# Altium PCB RPD_lower.PcbDoc
Units mm, origin at the board's own origin, x right, y up, seen from the top; angles counter-clockwise.
Board outline 100 x 100 mm, 4 copper layers (Top Layer, Internal Plane 1, Internal Plane 2, Bottom Layer), stack 0.462 mm thick; 87 components, 79 nets, 326 pads, 57 vias.
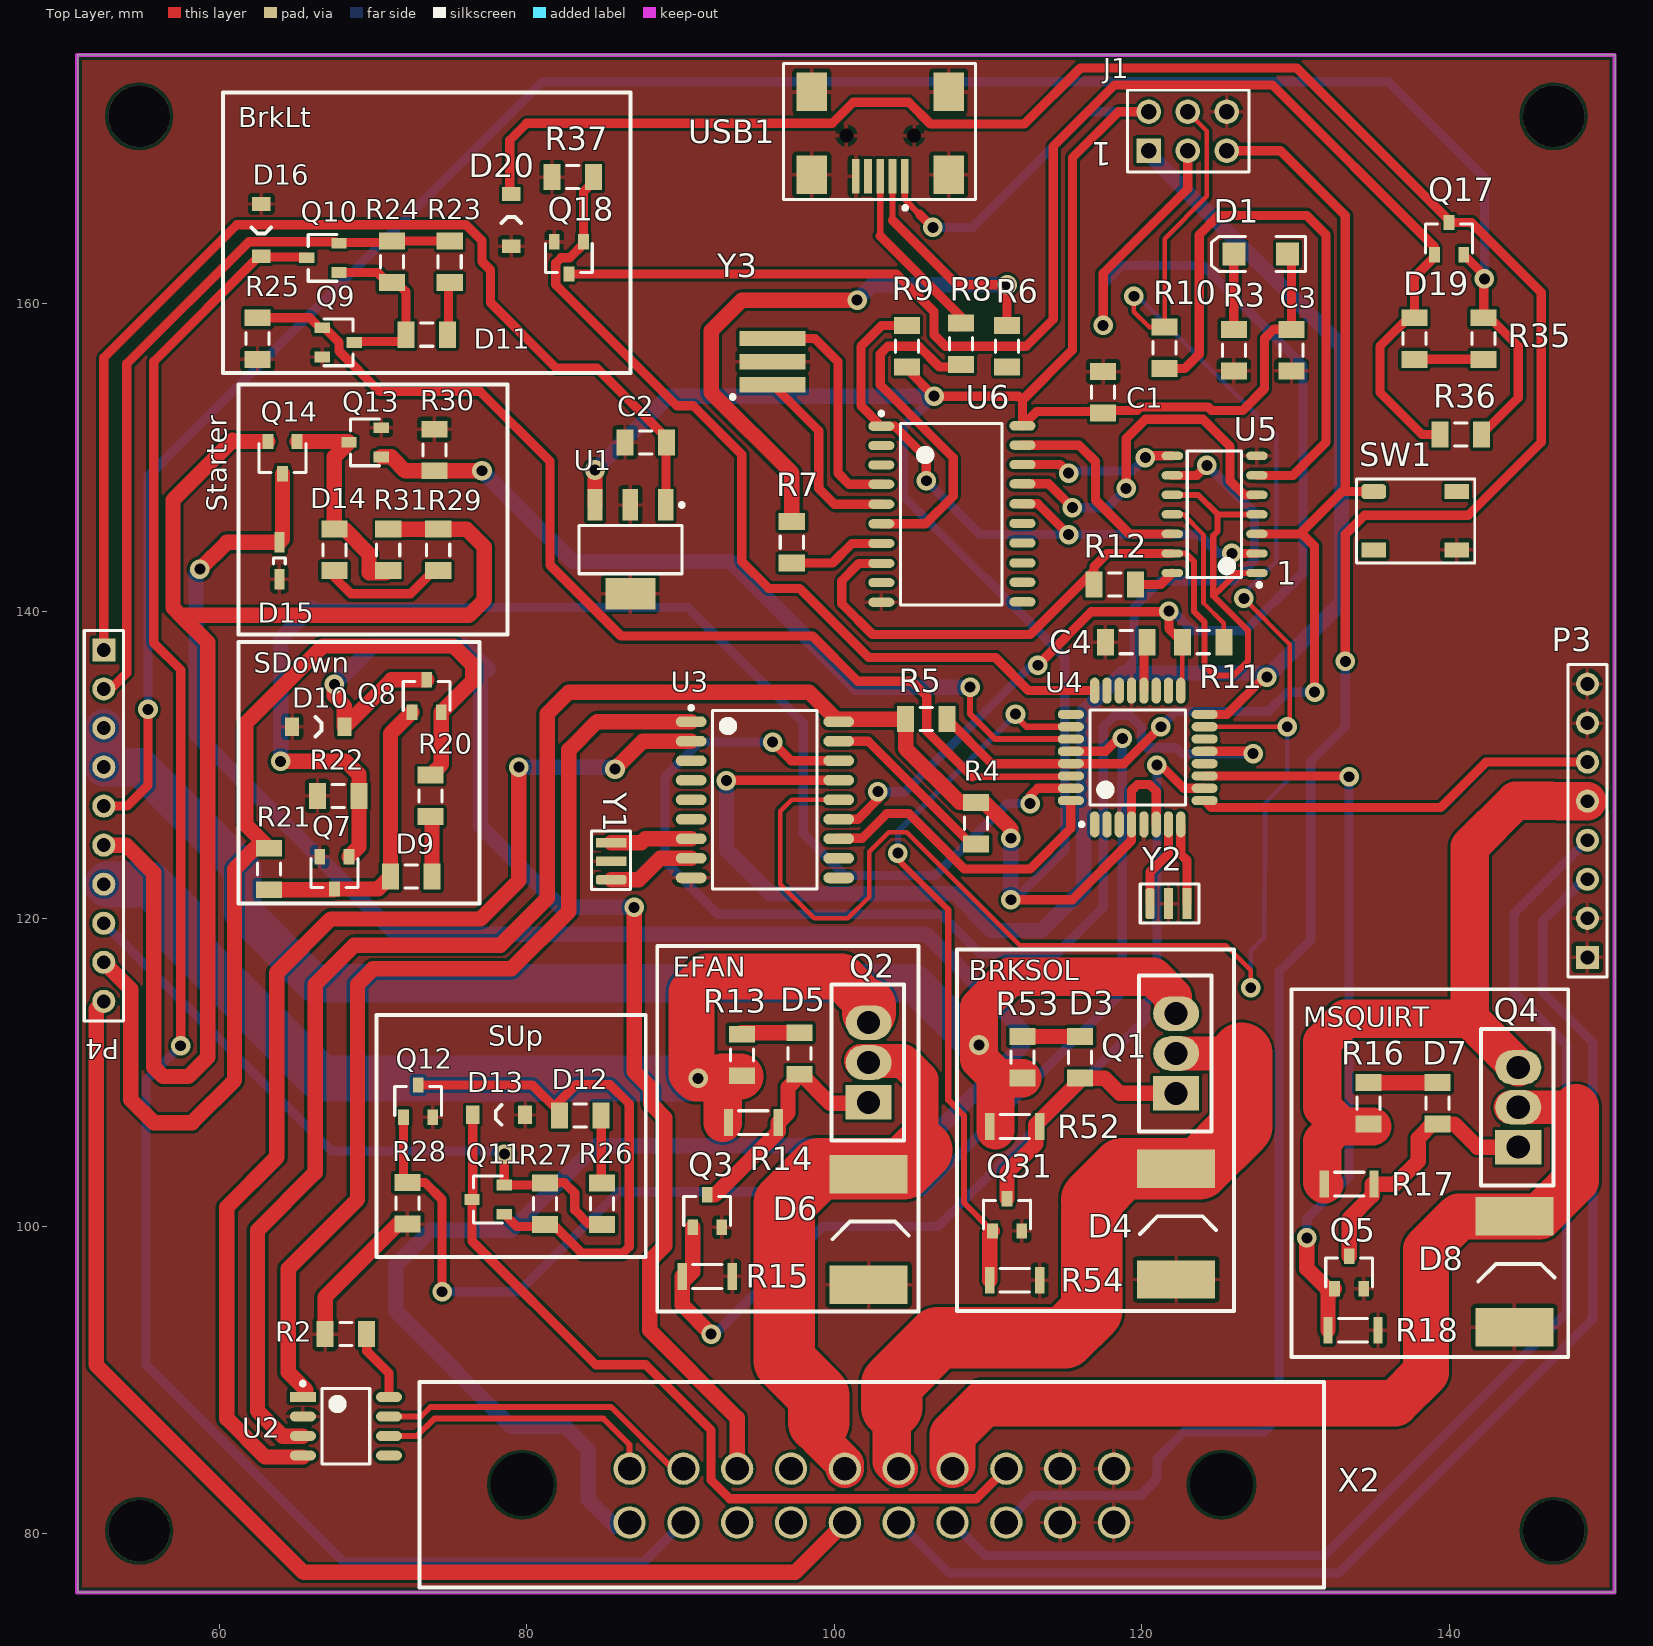
[diagram p0: Top Layer view]
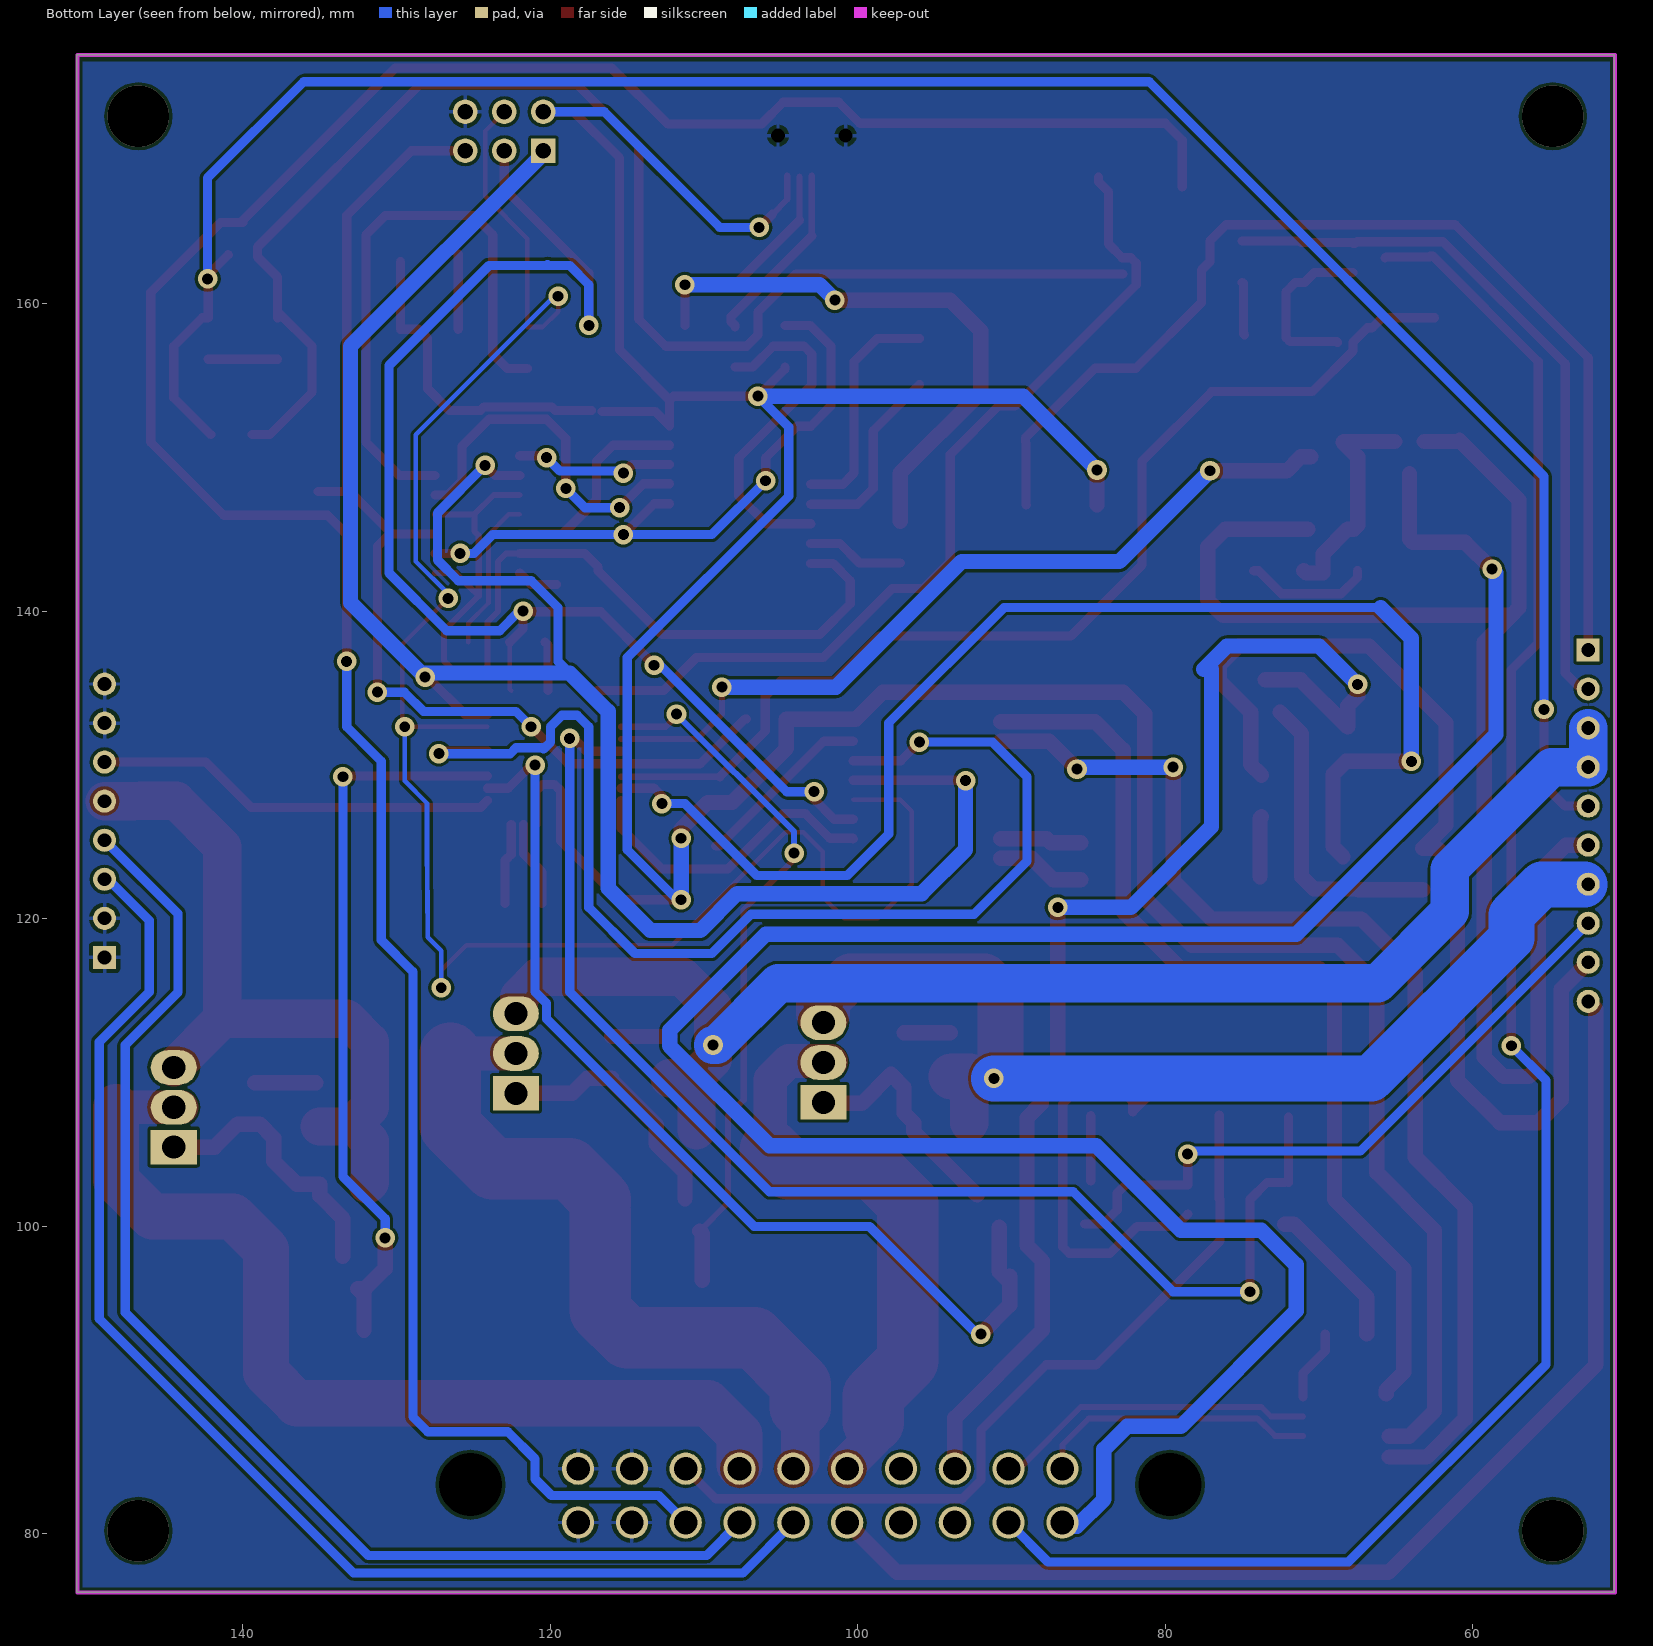
[diagram p1: Bottom Layer view, seen from below]
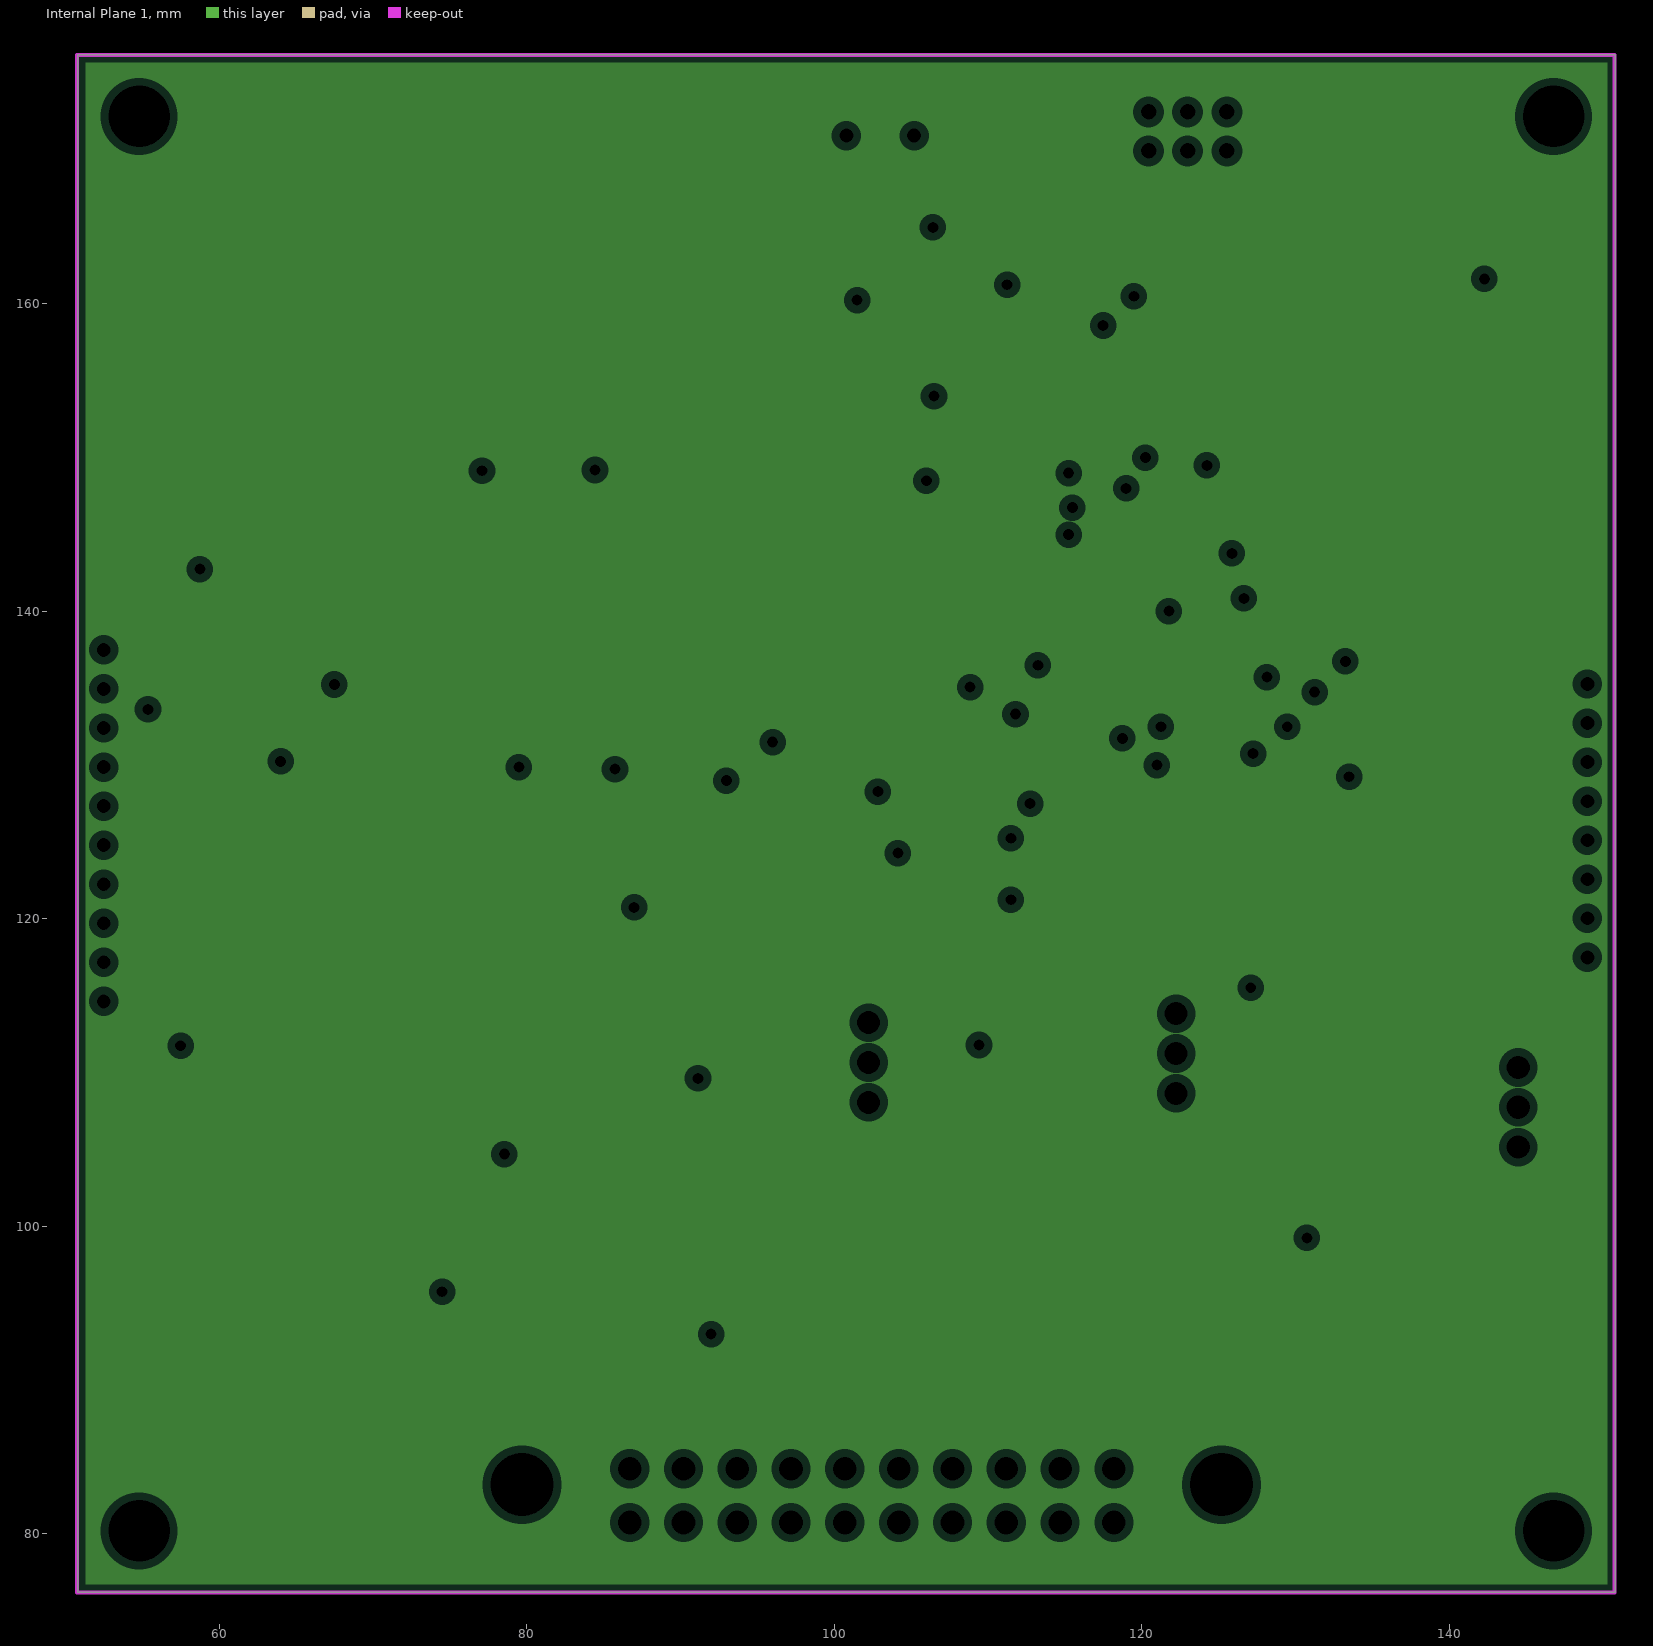
[diagram p2: Internal Plane 1, clearances drawn from the general rule]
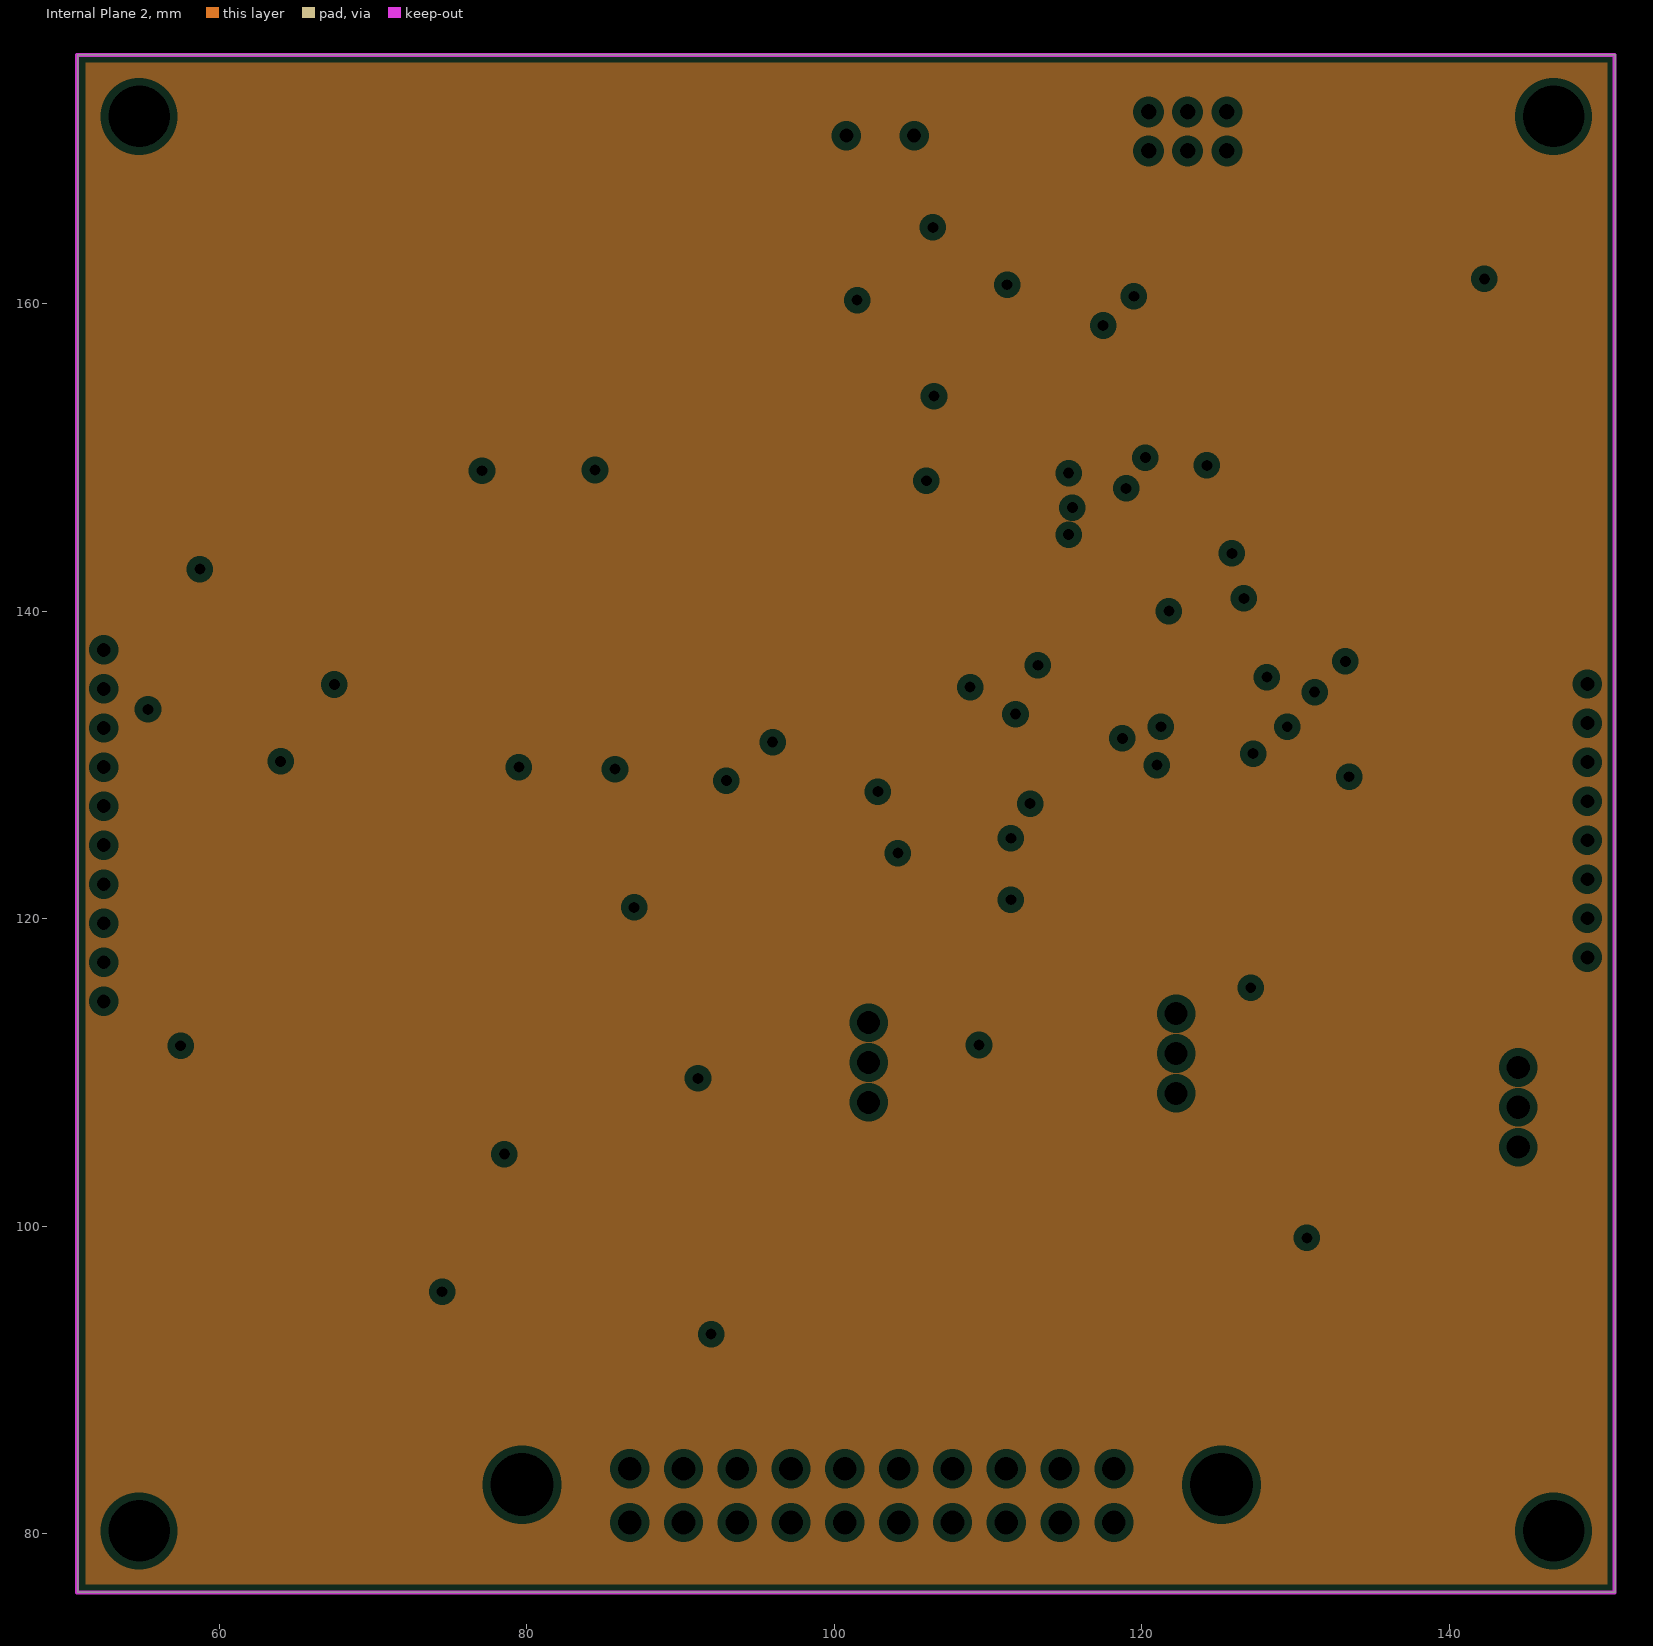
[diagram p3: Internal Plane 2, clearances drawn from the general rule]

## Layer stack, top to bottom
Top Solder: solder mask 0.0102, Solder Resist, Dk 3.5
Top Layer: signal copper 0.0356
Internal Plane 1: plane copper 0.0356
Internal Plane 2: plane copper 0.0356
Dielectric 1: dielectric 0.32, FR-4, Dk 4.8
Bottom Layer: signal copper 0.0356
Bottom Solder: solder mask 0.0102, Solder Resist, Dk 3.5

## Board outline
50.8,76.2 150.8,76.2 150.8,176.2 50.8,176.2

## Design rules (kind name [scope] priority, off if disabled: settings)
Clearance [All] p1: gap=0.2 ignorepadtopadclearanceinfootprint=FALSE
DiffPairsRouting [All] p1: maxlimit=0.254 minlimit=0.254 mostfreqgap=0.254 toplayer_minwidth=0.381 toplayer_maxwidth=0.381 toplayer_prefwidth=0.381 bottomlayer_minwidth=0.381 bottomlayer_maxwidth=0.381 bottomlayer_prefwidth=0.381 maxuncoupledlength=12.7
HoleSize [All] p1: absolutevalues=TRUE maxlimit=6 minlimit=0.025 maxpercent=80.000 minpercent=20.000
MinimumSolderMaskSliver [All] p1: minsoldermaskwidth=0.08
PlaneClearance [All] p1: clearance=0.508
PlaneConnect [All] p1: planeconnectstyle=Relief reliefexpansion=0.508 reliefentries=4 reliefconductorwidth=0.254 reliefairgap=0.254
PolygonConnect [All] p1: connectstyle=Relief reliefconductorwidth=0.254 reliefentries=4 polygonreliefangle="90 Angle" airgapwidth=0.254
RoomDefinition SpareSwitch [InComponentClass('SpareSwitch')] p1 off: confinementstyle=ConfineIn formatcopy=TRUE lockcomponents=FALSE outline 162,168 202,168 202,177 162,177
RoomDefinition HighCurrentSwitch [InComponentClass('HighCurrentSwitch')] p2 off: confinementstyle=ConfineIn formatcopy=TRUE lockcomponents=FALSE outline 152,94 272,94 272,108 152,108
RoomDefinition RearPowerLower [InComponentClass('RearPowerLower')] p3 off: confinementstyle=ConfineIn formatcopy=TRUE lockcomponents=FALSE outline 152.019,103.124 159.766,103.124 159.766,134.112 152.019,134.112
RoomDefinition LowCurrentSwitch [InComponentClass('LowCurrentSwitch')] p4 off: confinementstyle=ConfineIn formatcopy=TRUE lockcomponents=FALSE outline 152.019,94.361 305.689,94.361 305.689,101.854 152.019,101.854
RoomDefinition Controller [InComponentClass('Controller')] p5 off: confinementstyle=ConfineIn formatcopy=TRUE lockcomponents=FALSE outline 152.019,77.724 271.145,77.724 271.145,93.218 152.019,93.218
RoutingVias [All] p1: holewidth=0.6 width=1 viastyle="Through Hole" minholewidth=0.711 minwidth=1.27 maxholewidth=0.711 maxwidth=1.27
SilkToSilkClearance [All] p1: silktosilkclearance=0.1
SilkToSolderMaskClearance [IsPad] p1: minsilkscreentomaskgap=0.12 clearancetoexposedcopper=TRUE
SolderMaskExpansion [All] p1: expansion=0.102
Width [All] p1: maxlimit=6 minlimit=0.2 preferedwidth=0.6
23 further rules are at their usual default settings.

## Classes and differential pairs
component class Controller: C1 C2 C3 C4 D1 J1 R2 R3 R4 R5 R6 R7 R8 R9 R10 R11 R12 SW1 U1 U2 U3 U4 U5 U6 USB1 Y1 Y2 Y3
component class LowCurrentSwitch: D9 D10 D11 D12 D13 D14 D15 D16 Q7 Q8 Q9 Q10 Q11 Q12 Q13 Q14 R20 R21 R22 R23 R24 R25 R26 R27 R28 R29 R30 R31
component class RearPowerLower: P3 P4 X2
component class HighCurrentSwitch: D3 D4 D5 D6 D7 D8 Q1 Q2 Q3 Q4 Q5 Q31 R13 R14 R15 R16 R17 R18 R52 R53 R54
component class SpareSwitch: D19 D20 Q17 Q18 R35 R36 R37
differential pair CAN: +CAN_P -CAN_N

## Components (designator, comment, footprint, x,y, rotation, side; value= is the part's Value field where it differs from the comment)
C1 "0.1uF" C1206 117.5,154.25 r270 top
C2 "" C1206 87.75,151 r180 top value=0.33uF
C3 "0.1uF" C1206 129.75,157 r90 top
C4 "0.1uF" C1206 119,138 r180 top
D1 "PWR" 3.2X1.6X1.1 127.75,163.25 r180 top
D3 "LED0" C1206 116,111 r270 top
D4 "Diode" S10D-TP 122.25,96.85 r90 top
D5 "LED0" C1206 97.75,111.25 r270 top
D6 "Diode" S10D-TP 102.25,96.5 r90 top
D7 "LED0" C1206 139.25,108 r270 top
D8 "Diode" S10D-TP 144.25,93.75 r90 top
D9 "LED0" C1206 72.5,122.75 r180 top
D10 "Diode" sod-123 64.75,132.5 r0 top
D11 "LED0" C1206 73.5,158 r180 top
D12 "LED0" C1206 83.5,107.225 r180 top
D13 "Diode" sod-123 79.9,107.25 r180 top
D14 "LED0" C1206 67.5,144 r90 top
D15 "Diode" SOD-323 63.925,144.5 r270 top
D16 "Diode" sod-123 62.75,166.5 r270 top
D19 "LED0" C1206 137.75,157.75 r90 top
D20 "Diode" sod-123 79,163.75 r90 top
J1 "ICSP" "ICSP Connector" 125.54,169.985 r180 top
P3 "Header 8" HDR1X8 149,117.5 r90 top
P4 "Header 10" HDR1X10 52.5,137.5 r270 top locked
Q1 "MOSFET-P" TO-220 122.25,111.25 r90 top
Q2 "MOSFET-P" TO-220 102.25,110.66 r90 top
Q3 "MOSFET-N" SOT23f 91.75,101 r90 top
Q4 "MOSFET-P" TO-220 144.5,107.75 r90 top
Q5 "MOSFET-N" SOT23f 133.5,97 r90 top
Q7 "MOSFET-N" SOT23f 67.5,123 r270 top
Q8 "MOSFET-P" SOT23f 73.5,134.5 r90 top
Q9 "MOSFET-N" SOT23f 67.75,157.5 r0 top
Q10 "MOSFET-P" SOT23f 66.75,163 r180 top
Q11 "MOSFET-P" SOT23f 77.5,101.75 r180 top
Q12 "MOSFET-N" SOT23f 72.95,108.15 r90 top
Q13 "MOSFET-N" SOT23f 69.5,151 r180 top
Q14 "MOSFET-P" SOT23f 64.125,150 r270 top
Q17 "MOSFET-P" SOT23f 140,164.25 r90 top
Q18 "MOSFET-N" SOT23f 82.75,163 r270 top
Q31 "MOSFET-N" SOT23f 111.25,100.75 r90 top
R2 "16.9K" C1206 68.25,93 r180 top
R3 "1k" C1206 126,157 r270 top
R4 "10K" C1206 109.225,126.225 r270 top
R5 "10k" C1206 106,133 r180 top
R6 "1k" C1206 111.25,157.25 r270 top
R7 "27" C1206 97.25,144.5 r270 top
R8 "27" C1206 108.25,157.4 r270 top
R9 "1k" C1206 104.75,157.25 r90 top
R10 "100" C1206 121.5,157.15 r90 top
R11 "100" C1206 124,138 r180 top
R12 "22k" C1206 118.25,141.75 r0 top
R13 "1206" C1206 94,111.15 r90 top value=500
R14 "1206" "1206 (High Density)" 94.75,106.75 r180 top value=1M
R15 "1206" "1206 (High Density)" 91.75,96.75 r180 top value=1M
R16 "1206" C1206 134.75,108 r90 top value=500
R17 "1206" "1206 (High Density)" 133.5,102.75 r180 top value=1M
R18 "1206" "1206 (High Density)" 133.75,93.25 r180 top value=1M
R20 "1206" C1206 73.75,128 r270 top value=510
R21 "1206" C1206 63.25,123.25 r90 top value=1M
R22 "1206" C1206 67.75,128 r0 top value=1M
R23 "1206" C1206 75,162.75 r270 top value=510
R24 "Res1" C1206 71.25,162.75 r90 top value=1M
R25 "Res1" C1206 62.5,157.75 r90 top value=1M
R26 "1206" C1206 84.9,101.475 r90 top value=510
R27 "1206" C1206 81.2,101.475 r90 top value=1M
R28 "1206" C1206 72.25,101.5 r90 top value=1M
R29 "1206" C1206 74.25,144 r270 top value=510
R30 "1206" C1206 74,150.5 r270 top value=1M
R31 "1206" C1206 71,144 r90 top value=1M
R35 "1206" C1206 142.25,157.75 r270 top value=510
R36 "1206" C1206 140.75,151.5 r0 top value=1M
R37 "1206" C1206 83,168.25 r0 top value=1M
R52 "1206" "1206 (High Density)" 111.75,106.5 r180 top value=1M
R53 "1206" C1206 112.25,111 r90 top value=500
R54 "1206" "1206 (High Density)" 111.75,96.5 r180 top value=1M
SW1 "PTS525SM15SMTR2" PTS525SM15SMTR2 135.1,147.8 r0 top
U1 "UA7805CKTTR" SOT223 86.75,143.75 r270 top
U2 "MCP2551-E/SN" SOIC127P600X175-8M 68.25,87 r0 top
U3 "MCP2515-E/ST" SOIC127P1030X265-18M 95.5,127.75 r0 top
U4 "ATMEGA328P" "ATMEGA328P-15AZ - 2" 119.75,130.5 r90 top
U5 "74ACT125D" "14 pin buffer" 124.7,144.5 r180 top
U6 "ATTINY2313-20S" ATTINY 107.425,146.325 r0 top
USB1 "USB Header" USBminiB 103,170.95 r180 top
X2 "MX150-20" "20 Pin MX150" 79.7,83.2 r0 top locked
Y1 "CSTCE16M0V53-R0" CSTCE16M0V53-R0 85.5,122.55 r90 top
Y2 "CSTCE16M0V53-R0" CSTCE16M0V53-R0 120.55,121 r0 top
Y3 "CSTCE16M0V53-R0" 12MHzCRES 96,156.25 r90 top

## Footprints (in the part's own frame and the unit in brackets; to place one, negate y for a bottom-side part, rotate by r counter-clockwise, add the part's x,y. Pads: shape width x height; smd on the part's side, far side on the other; paste and mask are expansions set on the pad)
3.2X1.6X1.1 [mm] "SMT LED; 2 Flat Leads"
  rect 1.5x1.5 smd: 1(-1.75,0) 2(1.75,0)
  silkscreen extent -2.9,-1.15 3.2,1.15
12MHzCRES [mm] "12MHz 22pF Ceramic Resonator"
  rect 1x4.3 smd: 1(-1.5,0) 2(0,0) 3(1.5,0)
  silkscreen extent -2.42,2.47 -2.18,2.72
"14 pin buffer" [mm] "DIGIKEY: MC74ACT125DTR2GOSCT-ND, TSOP, 14-Leads, Body 5.00x4.40mm, Pitch 0.65mm, IPC Medium Density"
  oval 1.4x0.55 smd: 1(-2.8,2) 2(-2.8,0.73) 3(-2.8,-0.54) 4(-2.8,-1.81) 5(-2.8,-3.08) 6(-2.8,-4.35) 7(-2.8,-5.62) 8(2.7,-5.62) 9(2.7,-4.35) 10(2.7,-3.08) 11(2.7,-1.81) 12(2.7,-0.54) 13(2.7,0.73) 14(2.7,2)
  silkscreen extent -3.08,-5.92 1.73,2.9, body extent -2.1,-5.9 2,2.3, height 0.25
"20 Pin MX150" [mm]
  round 2.1 hole 1.54: 1(7,1.04) 2(10.5,1.04) 3(14,1.04) 4(17.5,1.04) 5(21,1.04) 6(24.5,1.04) 7(28,1.04) 8(31.5,1.04) 9(35,1.04) 10(38.5,1.04) 11(7,-2.46) 12(10.5,-2.46) 13(14,-2.46) 14(17.5,-2.46) 15(21,-2.46) 16(24.5,-2.46) 17(28,-2.46) 18(31.5,-2.46) 19(35,-2.46) 20(38.5,-2.46)
  round 0 hole 4.1 unplated: 30(0,0) 31(45.5,0)
  silkscreen extent -6.67,-6.68 52.17,6.68
"1206 (High Density)" [mm] "Panasonic 1206 Resistor"
  rect 0.6x1.75 smd: 1(-1.625,0) 2(1.625,0)
  silkscreen extent -0.95,-0.77 0.95,0.77, body extent -1.5,-0.72 1.5,0.72, height 0.7
"ATMEGA328P-15AZ - 2" [mm] "TQFP, 32-Leads, Body 7.00x7.00mm, Pitch 0.80mm, IPC Low Density"
  oval 1.7x0.6 smd: 1(-4.35,2.8) 2(-4.35,2) 3(-4.35,1.2) 4(-4.35,0.4) 5(-4.35,-0.4) 6(-4.35,-1.2) 7(-4.35,-2) 8(-4.35,-2.8) 17(4.35,-2.8) 18(4.35,-2) 19(4.35,-1.2) 20(4.35,-0.4) 21(4.35,0.4) 22(4.35,1.2) 23(4.35,2) 24(4.35,2.8)
  oval 0.6x1.7 smd: 9(-2.8,-4.35) 10(-2,-4.35) 11(-1.2,-4.35) 12(-0.4,-4.35) 13(0.4,-4.35) 14(1.2,-4.35) 15(2,-4.35) 16(2.8,-4.35) 25(2.8,4.35) 26(2,4.35) 27(1.2,4.35) 28(0.4,4.35) 29(-0.4,4.35) 30(-1.2,4.35) 31(-2,4.35) 32(-2.8,4.35)
  silkscreen extent -4.47,-3.1 3.1,3.77, body extent -3.5,-3.5 3.5,3.5, height 1.2
ATTINY [mm] "TQFP, 32-Leads, Body 7.00x7.00mm, Pitch 0.80mm, IPC Low Density"
  oval 1.7x0.6 smd: 1(-4.35,5.725) 2(-4.355,4.465) 3(-4.355,3.205) 4(-4.35,1.95) 5(-4.35,0.65) 6(-4.35,-0.625) 7(-4.35,-1.9) 8(-4.35,-3.2) 9(-4.35,-4.45) 10(-4.35,-5.725) 11(4.825,-5.7) 12(4.825,-4.425) 13(4.825,-3.175) 14(4.825,-1.875) 15(4.825,-0.6) 16(4.825,0.675) 17(4.825,1.975) 18(4.83,3.23) 19(4.83,4.49) 20(4.825,5.75)
  silkscreen extent -4.47,-5.9 3.5,6.67, body extent -3.5,-6.3 4,6.3, height 1.2
C1206 [mm] "Chip Capacitor, Body 3.2x1.6mm, IPC High Density"
  rect 1.1x1.7 smd: 1(-1.35,0) 2(1.35,0)
  silkscreen extent -0.4,-0.75 0.4,0.75, body extent -1.7,-0.9 1.7,0.9, height 1.3
CSTCE16M0V53-R0 [mm] "16MHz Resonator"
  rrect50% 0.6x2 smd: 1(0,0)
  rect 0.6x2 smd: 2(1.2,0) 3(2.4,0)
  silkscreen extent -0.64,-1.27 3.17,1.27
HDR1X8 [mm] "Connector; Header; 8 Position"
  rect 1.5x1.5 hole 0.9: 1(0,0)
  round 1.5 hole 0.9: 2(2.54,0) 3(5.08,0) 4(7.62,0) 5(10.16,0) 6(12.7,0) 7(15.24,0) 8(17.78,0)
  silkscreen extent -1.27,-1.27 19.05,1.27
HDR1X10 [mm] "Connector; Header; 10 Position"
  rect 1.5x1.5 hole 0.9: 1(0,0)
  round 1.5 hole 0.9: 2(2.54,0) 3(5.08,0) 4(7.62,0) 5(10.16,0) 6(12.7,0) 7(15.24,0) 8(17.78,0) 9(20.32,0) 10(22.86,0)
  silkscreen extent -1.27,-1.27 24.13,1.27
"ICSP Connector" [mm]
  rect 1.6x1.6 hole 1: 1(5.08,0.025)
  round 1.6 hole 1: 2(5.08,-2.515) 3(2.54,0.025) 4(2.54,-2.515) 5(0,0.025) 6(0,-2.515)
  silkscreen extent -1.45,-3.91 6.45,1.4
PTS525SM15SMTR2 [mm] "Tact Switch"
  rrect50% 1.6x1 smd: 1(0,0)
  rect 1.6x1 smd: 2(5.4,0) 3(0,-3.8) 4(5.4,-3.8)
  silkscreen extent -1.12,-4.65 6.58,0.81
S10D-TP [mm] "Load flyback"
  rect 2.5x5.08 smd: 1(-0.3,0) 2(6.9,0)
  silkscreen extent 2.67,-2.6 3.81,2.35
sod-123 [mm] "Zener Diode"
  rect 0.9x1.2 smd: 1(0,0) 2(3.4,0)
  silkscreen extent 1.52,-0.64 1.91,0.64
SOD-323 [mm] "FLYBACK DIODE"
  rect 1.35x0.65 smd: 1(2.4,0) 2(0,0)
  silkscreen extent 1.02,-0.38 1.4,0.38
SOIC127P600X175-8M [mm] "SOIC, 8-Leads, Body 4.90x3.90mm, Pitch 1.27mm, IPC Low Density"
  rect 1.7x0.65 smd: 1(-2.8,1.905)
  oval 1.7x0.65 smd: 2(-2.8,0.635) 3(-2.8,-0.635) 4(-2.8,-1.905) 5(2.8,-1.905) 6(2.8,-0.635) 7(2.8,0.635) 8(2.8,1.905)
  silkscreen extent -2.92,-2.45 1.55,2.9, body extent -1.95,-2.45 1.95,2.45, height 1.75
SOIC127P1030X265-18M [mm] "SOIC, 18-Leads, Body 11.50x7.50mm, Pitch 1.27mm, IPC Low Density"
  oval 2x0.7 smd: 1(-4.8,5.08) 2(-4.8,3.81) 3(-4.8,2.54) 4(-4.8,1.27) 5(-4.8,0) 6(-4.8,-1.27) 7(-4.8,-2.54) 8(-4.8,-3.81) 9(-4.8,-5.08) 10(4.8,-5.08) 11(4.8,-3.81) 12(4.8,-2.54) 13(4.8,-1.27) 14(4.8,0) 15(4.8,1.27) 16(4.8,2.54) 17(4.8,3.81) 18(4.8,5.08)
  silkscreen extent -4.92,-5.8 3.4,6.1, body extent -3.8,-5.8 3.8,5.8, height 2.65
SOT23f [mm] "SOT23, 3-Leads, Body 2.90x2.40mm, Pitch 0.95mm, IPC Medium Density"
  rect 1x0.7 smd: 1(1.05,0) 2(-1.05,0.95) 3(-1.05,-0.95)
  silkscreen extent -0.92,-1.52 0.95,1.52
SOT223 [mm] "SOT223, 4-Leads, Body 6.50x7.00mm (avg), Pitch 2.30mm, IPC Low Density"
  rect 2.05x1 smd: 1(-3.175,2.3) 2(-3.175,0) 3(-3.175,-2.3)
  rect 2.05x3.25 smd: 4(2.6,0)
  silkscreen extent -3.3,-3.35 1.3,3.48, body extent -1.85,-3.35 1.3,3.35, height 1.8
TO-220 [mm]
  rect 2.25x3 hole 1.5: 1(-2.59,0)
  oval 2.25x3 hole 1.5: 2(0,0) 3(2.59,0)
  silkscreen extent -5.08,-2.29 5.08,2.41
USBminiB [mm] "USB header mini B"
  rect 0.5x2.25 smd: 1(-1.6,2.65) 2(-0.8,2.65) 3(0,2.65) 4(0.8,2.65) 5(1.6,2.65)
  rect 2x2.5 smd: 5(-4.45,-2.85) 5(-4.45,2.55) 5(4.45,-2.85) 5(4.45,2.55)
  round 0 hole 0.9 mask+0: 5(-2.2,0)
  round 0 hole 0.9 paste+0 mask+0: 5(2.2,0)
  silkscreen extent -6.2,-4.7 6.3,4.82

## Part data
C1 C4: library part Capacitor, "0603", Supplier Part Number 1=399-5615-1-ND, Supplier 1=Digi-Key
C2: library part "Cap Semi", "Capacitor (Semiconductor SIM Model)", Supplier Part Number 1=399-1285-1-ND, LatestRevisionDate=29-May-2009, LatestRevisionNote="IPC-7351 Footprint Added.", PackageDescription="Chip Capacitor", PackageReference=C1206, Published=8-Jun-2000, Publisher="Altium Limited", Supplier 1=Digi-Key
C3: library part Capacitor, Supplier Part Number 1=399-5615-1-ND, Supplier 1=Digi-Key
D1: library part LED2, "Typical RED, GREEN, YELLOW, AMBER GaAs LED", Supplier Part Number 1=160-1456-1-ND, LatestRevisionDate=17-Jul-2002, LatestRevisionNote="Re-released for DXP Platform.", PackageDescription="SM LED; 2 Flat Leads", PackageReference=3.2X1.6X1.1, PackageVersion=Feb-2002, Published=8-Jun-2000, Publisher="Altium Limited", Supplier 1=Digi-Key
D3 D5 D7 D9 D11 D12 D14 D19: "Typical INFRARED GaAs LED", Supplier Part Number 1=1516-1172-1-ND, LatestRevisionDate=08-Jul-2005, LatestRevisionNote="Mech Layer 1 removed.", PackageDescription="LED; 2 Leads", PackageReference=LED-0, Published=8-Jun-2000, Publisher="Altium Limited", Supplier 1=Digi-Key
D4 D6 D8: "Default Diode", Supplier Part Number 1=S10D-TPMSCT-ND, Code_JEDEC=DO-214-AB, LatestRevisionDate=17-Jul-2002, LatestRevisionNote="Re-released for DXP Platform.", PackageDescription="DO-214-AB/SMC; 2 C-Bend Leads; Body 7.9 x 5.9 mm, inc. leads (LxW)", PackageReference=SMC, PackageVersion=Sep-1996, Published=8-Jun-2000, Publisher="Altium Limited", Supplier 1=Digi-Key
D10 D13 D16 D20: "Default Diode", Supplier Part Number 1=BAT42W-FDICT-ND, Code_JEDEC=DO-214-AB, LatestRevisionDate=17-Jul-2002, LatestRevisionNote="Re-released for DXP Platform.", PackageDescription="DO-214-AB/SMC; 2 C-Bend Leads; Body 7.9 x 5.9 mm, inc. leads (LxW)", PackageReference=SMC, PackageVersion=Sep-1996, Published=8-Jun-2000, Publisher="Altium Limited", Supplier 1=Digi-Key
D15: "Default Diode", Supplier Part Number 1=SDM10K45-FDICT-ND, Code_JEDEC=DO-214-AB, LatestRevisionDate=17-Jul-2002, LatestRevisionNote="Re-released for DXP Platform.", PackageDescription="DO-214-AB/SMC; 2 C-Bend Leads; Body 7.9 x 5.9 mm, inc. leads (LxW)", PackageReference=SMC, PackageVersion=Sep-1996, Published=8-Jun-2000, Publisher="Altium Limited", Supplier 1=Digi-Key
J1: library part "ICSP Connector", Supplier Part Number 1=952-2121-ND, Supplier 1=Digi-Key
P3: "Header, 8-Pin", Supplier Part Number 1=S7006-ND, LatestRevisionDate=17-Jul-2002, LatestRevisionNote="Re-released for DXP Platform.", Publisher="Altium Limited", Supplier 1=Digi-key
P4: "Header, 10-Pin", Supplier Part Number 1=S7008-ND, LatestRevisionDate=17-Jul-2002, LatestRevisionNote="Re-released for DXP Platform.", Publisher="Altium Limited", Supplier 1=Digi-Key
Q1 Q2 Q4: "P-Channel MOSFET", Supplier Part Number 1=FQP27P06-ND, LatestRevisionDate=17-Jul-2002, LatestRevisionNote="Re-released for DXP Platform.", PackageDescription="TO, Flat Index; 3 In-Line, Axial Leads; Body Dia. 4.6mm; Lead Dia. 0.5 mm (max)", PackageReference=E3, PackageVersion=1995/1996, Published=8-Jun-2000, Publisher="Altium Limited", Supplier 1=Digi-Key
Q3 Q5 Q7 Q9 Q12 Q13 Q18 Q31: "N-Channel MOSFET", Supplier Part Number 1=SSM3K329RLFCT-ND, LatestRevisionDate=17-Jul-2002, LatestRevisionNote="Re-released for DXP Platform.", PackageDescription="TO, Flat Index; 3 In-Line, Axial Leads; Body Dia. 4.6mm; Lead Dia. 0.5 mm (max)", PackageReference=E3, PackageVersion=1995/1996, Published=8-Jun-2000, Publisher="Altium Limited", Supplier 1=Digi-Key
Q8 Q10 Q11 Q14 Q17: "P-Channel MOSFET", Supplier Part Number 1=SSM3J334RLFCT-ND, LatestRevisionDate=17-Jul-2002, LatestRevisionNote="Re-released for DXP Platform.", PackageDescription="TO, Flat Index; 3 In-Line, Axial Leads; Body Dia. 4.6mm; Lead Dia. 0.5 mm (max)", PackageReference=E3, PackageVersion=1995/1996, Published=8-Jun-2000, Publisher="Altium Limited", Supplier 1=Digi-Key
R2: library part Resistor, "0603", Supplier Part Number 1=P16.9KBCCT-ND, Supplier 1=Digi-Key
R3 R6: library part Resistor, "1206", Supplier Part Number 1=P1.0KBCCT-ND, Supplier 1=Digi-Key
R4: library part Resistor, "0603", Supplier Part Number 1=RNCS1206BKE10K0CT-ND, Supplier 1=Digi-Key
R5: library part Resistor, "1206", Supplier 1=Digi-Key, Supplier 2=Digi-Key, Supplier Part Number 2=RNCS1206BKE10K0CT-ND
R7 R8: library part Resistor, "1206", Supplier Part Number 1=311-27ERCT-ND, Supplier 1=Digi-Key
R9: library part Resistor, "0603", Supplier Part Number 1=P1.0KBCCT-ND, Supplier 1=Digi-Key
R10 R11: library part Resistor, "1206", Supplier Part Number 1=RG32P100BCT-ND, Supplier 1=Digi-Key
R12: library part Resistor, "1206", Supplier Part Number 1=311-22KERCT-ND, Supplier 1=Digi-Key
R13 R16 R53: library part Res1, "Resistor", Supplier Part Number 1=RNCP1206FTD511RCT-ND, LatestRevisionDate=17-Jul-2002, LatestRevisionNote="Re-released for DXP Platform.", PackageDescription="Axial Device, Thru-Hole; 2 Leads; 0.3 in Pin Spacing", PackageReference=AXIAL-0.3, Published=8-Jun-2000, Publisher="Altium Limited", Supplier 1=Digi-Key
R14 R15 R17 R18 R54: library part Res1, "Resistor", Supplier Part Number 1=RG32P1.0MBCT-ND, LatestRevisionDate=17-Jul-2002, LatestRevisionNote="Re-released for DXP Platform.", PackageDescription="Axial Device, Thru-Hole; 2 Leads; 0.3 in Pin Spacing", PackageReference=AXIAL-0.3, Published=8-Jun-2000, Publisher="Altium Limited", Supplier 1=Digi-Key
R20 R23 R26 R29 R35: library part Res1, "Resistor", Supplier Part Number 1=RG32P510BCT-ND, LatestRevisionDate=17-Jul-2002, LatestRevisionNote="Re-released for DXP Platform.", PackageDescription="Axial Device, Thru-Hole; 2 Leads; 0.3 in Pin Spacing", PackageReference=AXIAL-0.3, Published=8-Jun-2000, Publisher="Altium Limited", Supplier 1=Digi-Key
R21 R22 R27 R28 R30 R31 R36 R37: library part Res1, "Resistor", Supplier Part Number 1=RHM1.0MPCT-ND, LatestRevisionDate=17-Jul-2002, LatestRevisionNote="Re-released for DXP Platform.", PackageDescription="Axial Device, Thru-Hole; 2 Leads; 0.3 in Pin Spacing", PackageReference=AXIAL-0.3, Published=8-Jun-2000, Publisher="Altium Limited", Supplier 1=Digi-Key
R24 R25: "Resistor", Supplier Part Number 1=RHM1.0MPCT-ND, LatestRevisionDate=17-Jul-2002, LatestRevisionNote="Re-released for DXP Platform.", PackageDescription="Axial Device, Thru-Hole; 2 Leads; 0.3 in Pin Spacing", PackageReference=AXIAL-0.3, Published=8-Jun-2000, Publisher="Altium Limited", Supplier 1=Digi-Key
R52: library part Res1, "1M Resistor", Supplier Part Number 1=RG32P1.0MBCT-ND, LatestRevisionDate=17-Jul-2002, LatestRevisionNote="Re-released for DXP Platform.", PackageDescription="Axial Device, Thru-Hole; 2 Leads; 0.3 in Pin Spacing", PackageReference=AXIAL-0.3, Published=8-Jun-2000, Publisher="Altium Limited", Supplier 1=Digi-Key
SW1: Supplier Part Number 1=CKN9104CT-ND, Supplier 1=Digi-Key
U1: "12V to 5V LDO 296-12290-1-ND", Supplier Part Number 1=296-12290-6-ND, Supplier 1=Digi-Key
U2: "SOIC", Supplier Part Number 1=MCP2551-E/SN-ND, Supplier 1=Digi-Key
U3: "SOIC", Supplier Part Number 1=MCP2515-I/SO-ND, Supplier 1=Digi-Key
U4: "TQFN", Supplier Part Number 1=ATMEGA328P-AU-ND, Supplier 1=Digi-Key
U5: "Buffer MC74ACT125DR2GOSCT-ND", Supplier Part Number 1=MC74ACT125DR2GOSDKR-ND, Supplier 1=Digi-Key
U6: "ATTINY", Supplier Part Number 1=ATTINY2313-20SURCT-ND, Supplier 1=Digi-Key
USB1: "USB mini B 609-4700-1-ND", Supplier Part Number 1=609-4700-1-ND, Supplier 1=Digi-Key
X2: library part "Header 10X2A", "Header, 10-Pin, Dual row", LatestRevisionDate=17-Jul-2002, LatestRevisionNote="Re-released for DXP Platform.", Publisher="Altium Limited"
Y1: "16MHz 15pf resonator 490-1198-1-ND", Supplier Part Number 1=490-1198-1-ND, Supplier 1=Digi-Key
Y2: Supplier Part Number 1=490-1198-1-ND, Supplier 1=Digi-Key
Y3: "16MHz 15pf resonator 490-1198-1-ND", Supplier Part Number 1=535-10007-6-ND, Supplier 1=Digi-Key

## Via types
v1: diameter 1.27, hole 0.711, Top Layer to Bottom Layer, 53 vias
v2: diameter 4, hole 4, Top Layer to Bottom Layer, 4 vias

## Nets (pads, with @x,y where several pads share a name; then routed paths per layer and width w, separated by ;. In a path a pad name is that pad's centre, name@x,y a point inside that pad or via, vN(x,y) a via of type N, cw(c..) or ccw(c..) an arc to the next point about the centre after c; other vN are vias at no path point)
5V: C1.2 C3.2 D1.1 J1.2 R4.1 R5.2 R9.1 U1.3 U2.3 U3.18 U4.4 U4.6 U6.20 USB1.1 | length 265.2
  Top Layer w0.4: USB1.1@104.6,168.35 USB1.1 104.6,166.8 105.55,165.85
  Top Layer w0.6: R9.1 104.75,155.75 v1(106.5,154) 112,154 112.25,153.75 ; 105.55,165.85 v1(106.421,164.979) ; v1(111.5,121.25) 115.5,121.25 119.35,125.1 U4.4 119.35,128.35 119.75,128.75 120.5,128.75 120.95,128.3 U4.6 ; 116.65,153 113.175,153 U6.20 112.25,153.75 ; C1.2@117.325,153.075 119.694,153.075 119.919,153.3 124.331,153.3 124.556,153.075 126.575,153.075 128,154.5 128,157.75 128.6,158.35 C3.2 D1.1@129.75,162.75 ; J1.2 118.5,172.5 115.5,169.5 115.5,157 112.25,153.75
  Top Layer w1: U2.3 64.135,86.365 62.5,88 62.5,99.75 66.25,103.5 66.25,115.75 68.8,118.3 78.3,118.3 81.335,121.335 81.335,133.335 82.75,134.75 98.38,134.75 100.13,133 R5.2 104.65,131.1 108.175,127.575 R4.1 109.775,127.575 111.5,125.85 v1(111.5,125.25) ; U1.3 v1(84.45,149.2)
  Bottom Layer w0.6: v1(106.421,164.979) 108.979,164.979 116.5,172.5 J1.2 ; v1(106.5,154) 104.5,152 104.5,147.5 115,137 115,124.5 111.75,121.25 v1(111.5,121.25)
  Bottom Layer w1: v1(84.45,149.2) 89.25,154 v1(106.5,154) ; v1@111.5,121.5 v1@111.5,125
AREF: C4.1 U4.20 | length 3.2
  Top Layer w0.6: U4.20 120.15,137.8 C4.1
BS: D4.2 Q1.2 X2.6 | length 48.1
  Top Layer w2.2: Q1.2 126.5,111.25
  Top Layer w2.5: 103.75,88.25 103.75,84.69 X2.6
  Top Layer w4: 103.75,88.25 103.75,89.75 106.75,92.75 115,92.75 116.75,94.5 116.75,101 ; 116.75,101.5 116.75,101.75 118.75,103.75 D4.2 123.75,103.75 126.5,106.5 126.5,111.25
BSVIN: P4.3 P4.4 Q1.3 R52.2 R53.1 | length 93.4
  Top Layer w2.5: 110.5,106.25 110.5,109.5 ; R53.1 110.65,109.65 109.425,110.875 v1(109.425,111.8) 109.425,114.25 111.425,116.25 120.75,116.25 122.045,114.955 Q1.3@122.045,114.045
  Bottom Layer w2.5: P4.3 P4.4 54.87,129.88 61.5,123.25 61.5,120.5 66.175,115.825 105.175,115.825 109.2,111.8 v1(109.425,111.8)
CAN_N: U2.6 X2.1 | length 18.4
  Top Layer w0.381: U2.6 72.865,86.365 74,87.5 85,87.5 86.7,85.8 X2.1
CAN_P: U2.7 X2.2 | length 21.1
  Top Layer w0.381: U2.7 73.135,87.635 73.75,88.25 85.5,88.25 89.51,84.24 X2.2
"CS CAN": U3.16 U4.13 | length 77.4
  Top Layer w0.6: v1(96,131.5) 97.21,130.29 U3.16 ; U4.13 127.1,130.9 v1(127.25,130.75)
  Bottom Layer w0.6: v1@96,131.25 v1(96,131.5) 91.25,131.5 89,129.25 89,123.75 92.45,120.3 106.95,120.3 109.5,117.75 114.5,117.75 117.5,120.75 117.5,132.5 118.25,133.25 119.25,133.25 120,132.5 120,131.5 120.447,131.053 120.53,131.135 122.239,131.135 122.623,130.75 v1(127.25,130.75)
CTL: R12.1 U5.1 U5.4 U5.10 U5.13 U6.8 | length 61.4
  Top Layer w0.4: U5.13 122.88,143.77 123.4,143.25 123.4,140 124.1,139.3 124.1,136.45 124.725,135.825 125.95,135.825 126.925,136.8 126.925,138.75 124.663,141.012 ; U5.10 123.67,147.58 124.94,146.31 ; U5.1 126.15,142.5 125.238,141.588 124.663,141.012 ; U5.4 124.94,146.31 ; 124.662,141.012 124.662,144.937 124.94,145.215 124.94,146.31
  Top Layer w0.6: U6.8 101.625,143.125 100.5,142 100.5,140.5 102.5,138.5 112.75,138.5 116.45,142.2 116.9,142.65 116.9,142.9 117.77,143.77 U5.13
FAN: D6.2 Q2.2 X2.5 | length 38.7
  Top Layer w2.2: Q2.2@101.75,110.75 104.5,110.75 105.7,109.55 105.7,104.95
  Top Layer w2.5: 99,87.25 99,86.25 100.7,84.55 X2.5 ; D6.2@102.5,104 D6.2@102.75,103.75
  Top Layer w4: 99,87.25 99,89 96.75,91.25 96.75,101.5 99,103.75 102.75,103.75 104.5,103.75 105.7,104.95
FVIN: P4.7 Q2.3 R13.1 R14.2 | length 69.4
  Top Layer w2.5: 92.75,106.75 92.75,109.75
  Top Layer w3: R13.1@93.9,109.75 92.75,109.75 92.625,109.625 v1(91.15,109.625) 91.05,109.625 90.725,109.95 90.725,115.225 91.75,116.25 100.5,116.25 Q2.3@102.27,114.375
  Top Layer w3.5: Q2.3@102.27,113.875 Q2.3@102.27,114.375
  Bottom Layer w3: P4.7@52.75,122.25 55.5,122.25 57.5,120.25 57.5,118.75 66.625,109.625 v1(91.15,109.625)
GND: C1.1 C2.2 C3.1 C4.2 D4.1 D6.1 D8.1 D10.1 D13.1 D15.1 D16.1 D20.1 J1.6 P3.1 P3.2 P3.7 P3.8 Q3.3 Q5.3 Q7.3 Q9.3 Q12.3 Q13.3 Q18.3 Q31.3 R2.2 R3.2 R15.1 R18.1 R22.1 R25.1 R28.1 R30.1 R37.1 R54.1 SW1.4 U1.2 U1.4 U2.2 U3.9 U4.3 U4.5 U4.21 U5.7 U6.10 USB1.5 X2.9 X2.10 X2.19 X2.20 Y1.2 Y2.2 Y3.2 | length 9.7
  Top Layer w1: R2.2 66.9,95.4 71.65,100.15 R28.1
"INT CAN": U3.12 U4.32 | length 20.2
  Top Layer w0.6: U3.12 100.34,125.25 101.825,125.25 103.425,126.85 104.875,126.85 108.475,123.25 112.75,123.25 115.4,125.9 U4.32
MISO': U5.8 U6.18 | length 10.3
  Top Layer w0.6: U6.18 114.695,149.555 v1(115.25,149) ; v1@120.38,150.12 U5.8
  Bottom Layer w0.6: v1(115.25,149) 115.385,149.135 119.385,149.135 v1(120.25,150)
MISO/D12: J1.1 U3.15 U4.16 U5.9 | length 132.1
  Top Layer w0.6: v1(93,129) 93.02,129.02 U3.15 ; U5.9 123.6,148.85 v1@124,149.25 ; U4.16 125.55,133.3 127.975,135.725 v1(128.15,135.725)
  Bottom Layer w0.6: 118.75,136 119.5,136.75 119.5,140.25 121.25,142 126,142 127.35,143.35 127.35,146.4 v1(124.25,149.5)
  Bottom Layer w1: v1@93,128.57 93,124.5 95.85,121.65 107.85,121.65 110.25,119.25 113.5,119.25 116.25,122 116.25,133.5 118.75,136 128.425,136 133,140.575 133,157.25 120.46,169.79 J1.1
MOSI': U5.5 U6.17 | length 23.2
  Top Layer w0.6: U6.17 113.95,148.3 v1@115.25,147 ; v1(119,148) 119,151.25 120.25,152.5 124,152.5 125.75,150.75 125.75,148.5 126.67,147.58 U5.5
  Bottom Layer w0.6: v1(115.5,146.75) 117.75,146.75 v1(119,148)
MOSI/D11: J1.4 R10.2 U3.14 U4.15 | length 125.6
  Top Layer w0.3: U3.14 97.25,127.75 96.5,127 96.5,122.25 98.7,120.05 100.9,120.05 102.275,121.425 102.275,124.375 103.55,125.65 104.725,125.65 112.075,118.3 125.475,118.3 127.1,116.675 v1(127.1,115.525) ; v1@119.5,160.25 119.5,159.5 120.5,158.5 R10.2 121.5,164.25 124.25,167 124.25,171.25 J1.4 ; U4.15 v1(129.475,132.5) 129.65,132.675 129.65,137.85 v1(126.65,140.85)
  Bottom Layer w0.3: v1(119.5,160.5) 119.75,160.5 128.75,151.5 128.75,143.25 126.65,141.15 v1(126.65,140.85) ; v1(127.1,115.525) 127.1,117.925 127.977,118.802 128.025,124.95 128.025,127.525 129.475,128.975 v1(129.475,132.5)
MS: D8.2 Q4.2 X2.7 | length 63
  Top Layer w2.2: Q4.2@144,107.75 148.25,107.75
  Top Layer w3: X2.7@107.7,84.495 107.7,86.45 109.75,88.5 136.5,88.5 138.5,90.5 138.5,98.5 140.65,100.65 D8.2 145.9,100.65 148.25,103 148.25,107.75
MSVIN: P3.5 Q4.3 R16.1 R17.2 | length 46.5
  Top Layer w2.5: R17.2 131.75,102.875 131.75,105.55 132.7,106.5 R16.1@135,106.5 ; 132.85,106.65 131.75,107.75 131.75,112 133.25,113.5 141.34,113.5 ; Q4.3 141.34,113.5 ; 146.625,127.7 144.35,127.7 141.34,124.69 141.34,113.5 ; 147.16,127.66 P3.5
NetD1_2: D1.2 R3.1 | length 4.9
  Top Layer w0.6: R3.1 D1.2
NetD3_1: D3.1 R53.2 | length 3.8
  Top Layer w1: R53.2 D3.1
NetD3_2: D3.2 Q1.1 Q31.1 R52.1 | length 16.5
  Top Layer w1: Q31.1 111.25,103.5 113.125,105.375 113.125,106.25 113.125,106.625 D3.2@116.15,109.65 ; D3.2 D3.2@116.15,109.65 ; Q1.1 118.59,108.66 117.6,109.65 D3.2@116.15,109.65
NetD5_1: D5.1 R13.2 | length 3
  Top Layer w1: R13.2@94,112.6 D5.1@97,112.6
NetD5_2: D5.2 Q2.1 Q3.1 R14.1 | length 15.8
  Top Layer w1: 92.25,102.05 96.375,106.175 R14.1 97,107.375 97,109.05 97.85,109.9 99.75,108 101.93,108 Q2.1@102.5,108.57
NetD7_1: D7.1 R16.2 | length 4
  Top Layer w1: R16.2@135.25,109.35 D7.1
NetD7_2: D7.2 Q4.1 Q5.1 R17.1 | length 17.9
  Top Layer w1: Q5.1 133.5,100.5 135,102 135,102.75 R17.1 136.5,102.75 138,104.25 138,105.75 138.9,106.65 D7.2 140.35,106.65 141.84,105.16 Q4.1
NetD9_1: D9.1 R20.2 | length 3.9
  Top Layer w1: R20.2 73.85,126.55 D9.1
NetD9_2: D9.2 Q7.1 Q8.2 R21.1 | length 19.5
  Top Layer w1: R21.1 67.45,121.9 Q7.1 70.35,121.95 D9.2 71.15,132.05 Q8.2
NetD10_2: D10.2 Q8.1 X2.3 | length 84.3
  Top Layer w1: v1(67.5,135.25) 67.5,134.5 68.15,133.85 D10.2 71.2,135.55 Q8.1 ; v1(87,120.75) 87,110.075 88.075,109 88.075,107.989 89,107.064 89,98.75 88,97.75 88,93.25 93.7,87.55 X2.3
  Bottom Layer w1: v1(67.5,135.25) 70,137.75 76,137.75 77.5,136.25 77,136.25 77,126 82.25,120.75 v1(87,120.75)
NetD11_1: D11.1 R23.2 | length 3.5
  Top Layer w0.6: D11.1 74.925,158.075 74.925,161.325 R23.2
NetD11_2: D11.2 Q9.1 Q10.2 R24.1 | length 11.3
  Top Layer w0.6: Q10.2 70.3,162.05 70.95,161.4 71.55,161.4 72.15,160.8 72.15,157.8 71.9,157.55 68.85,157.55 Q9.1
NetD12_1: D12.1 R26.2 | length 4.3
  Top Layer w0.6: R26.2@84.85,102.95 D12.1@84.85,107.2
NetD12_2: D12.2 Q11.2 Q12.1 R27.1 | length 34.8
  Top Layer w0.6: Q12.1 80.375,109.2 82.125,107.45 82.125,108.125 83.225,109.225 85.425,109.225 86.675,107.975 86.675,98.675 86.25,98.25 83.6,98.25 81.85,100 79.35,100 Q11.2
NetD13_2: D13.2 Q11.1 X2.8 | length 52.6
  Top Layer w0.6: D13.2 76.5,101.8 Q11.1 76.45,99.05 84.5,91 87.75,91 92,86.75 92,83.5 93.21,82.29 109.25,82.29 X2.8
NetD14_1: D14.1 R29.2 | length 8.2
  Top Layer w0.6: D14.1 67.5,142.225 68.575,141.15 72.45,141.15 73.95,142.65 R29.2
NetD14_2: D14.2 Q13.1 Q14.2 R31.1 | length 14.8
  Top Layer w1: Q14.2 68.4,151.05 Q13.1 67.5,150.05 67.5,145.6 67.75,145.35 68.15,145.35 69.75,143.75 69.75,142.5 70.85,142.5 R31.1
NetD15_2: D15.2 Q14.1 X2.11 | length 156.3
  Top Layer w1: v1(58.75,142.75) 60.5,144.5 D15.2 64.125,144.7 Q14.1
  Bottom Layer w1: v1@58.5,142.5 58.5,132 71.5,119 106,119 112.25,112.75 112.25,111.75 105.75,105.25 84.5,105.25 79,99.75 73.75,99.75 71.5,97.5 71.5,94.5 79,87 82.5,87 84,85.5 84,82.25 85.75,80.5 86.46,80.5 X2.11
NetD16_2: D16.2 Q10.1 X2.12 | length 121
  Top Layer w0.6: v1(57.5,111.75) 57.5,136.2 55.75,137.95 55.75,156.25 62.6,163.1 D16.2 62.8,163.05 65.65,163.05 Q10.1
  Bottom Layer w0.6: v1(57.5,111.75) 55.25,109.5 55.25,91.025 68.1,78.175 87.635,78.175 X2.12
NetD19_1: D19.1 R35.2 | length 4.5
  Top Layer w0.6: D19.1 R35.2
NetD19_2: D19.2 Q17.2 Q18.1 R36.1 | length 93.5
  Top Layer w0.6: Q18.1 104.05,161.95 106.5,159.5 106.5,157.993 107.243,157.25 112.5,157.25 114.25,159 114.25,170.25 118.25,174.25 128.5,174.25 139.05,163.7 Q17.2 139.05,163.05 137.75,161.75 D19.2@137.75,159.5 ; D19.2 D19.2@137.75,159.5 ; R36.1 138.25,151.5 135.5,154.25 135.5,157.25 D19.2@137.75,159.5
NetD20_2: D20.2 Q17.1 X2.18 | length 184.9
  Top Layer w0.6: 78.9,167.607 78.9,170.65 80,171.75 99.875,171.75 101.25,173.125 104.85,173.125 106.275,171.7 112.373,171.7 116.023,175.35 130.1,175.35 140,165.45 Q17.1 141.45,165.3 146,160.75 146,151 141.25,146.25 134.5,146.25 133.25,145 v1(133.25,136.75)
  Bottom Layer w0.6: X2.18 112.96,82.5 119.925,82.5 121,83.575 121,84.875 122.775,86.65 127.975,86.65 128.946,87.621 128.946,93.321 128.946,116.571 131,118.625 131,130.25 133.25,132.5 v1(133.25,136.75)
NetP3_3: P3.3 X2.16 | length 84.6
  Bottom Layer w0.6: X2.16 107.49,77.45 132.8,77.45 149.35,94 149.35,112 146.1,115.25 146.1,119.9 148.78,122.58 P3.3
NetP3_4: P3.4 X2.17 | length 81.5
  Bottom Layer w0.6: X2.17 109.84,78.6 131.85,78.6 147.65,94.4 147.65,111.8 144.225,115.225 144.225,120.345 P3.4
NetP3_6: P3.6 U4.9 | length 26.3
  Top Layer w0.6: U4.9 124.55,127.25 139.45,127.25 142.4,130.2 P3.6
NetP4_2: P4.2 Q10.3 R23.1 R24.2 | length 46.4
  Top Layer w0.6: P4.2 52.96,134.96 54,136 54,156.107 61.943,164.05 67.55,164.05 67.65,163.95 Q10.3 67.85,164 71.15,164 R24.2 R23.1
NetP4_5: P4.5 Q17.3 R35.1 R36.2 | length 144.5
  Top Layer w0.6: P4.5 54.015,127.34 55.375,128.7 55.375,133.275 v1@55.55,133.45 ; Q17.3 142.25,161.9 R35.1 142.65,159.1 144.5,157.25 144.5,153.9 R36.2
  Bottom Layer w0.6: v1(55.375,133.625) 55.375,148.775 81.05,174.45 136.05,174.45 142.3,168.2 v1(142.3,161.625)
NetP4_6: P4.6 Q14.3 R29.1 R31.2 | length 96.5
  Top Layer w1: P4.6 53.95,124.8 55.75,123 55.75,110.362 56.362,109.75 58,109.75 59.25,111 59.25,138 57.5,139.75 ; 60.875,151.125 60.8,151.05 ; Q14.3 60.8,151.05 ; R31.2@70.75,145.35 R31.2 R29.1 76.1,145.35 77.25,144.2 77.25,140.75 76.25,139.75 57.5,139.75 ; 57.5,139.75 57,140.25 57,147.25 60.8,151.05
NetP4_8: P4.8 Q11.3 R26.1 R27.2 | length 42.8
  Top Layer w0.6: v1(78.55,104.7) Q11.3 81.85,102.7 82,102.85 82.45,102.85 83.125,102.175 83.125,101.075 84.05,100.15 R26.1@85.25,100.15
  Bottom Layer w0.6: P4.8 67.32,104.9 78.35,104.9 v1(78.55,104.7)
NetP4_9: P4.9 Q8.3 R20.1 R21.2 | length 69.1
  Top Layer w1: P4.9 54.25,115.43 54.25,108.25 55.75,106.75 58.25,106.75 61,109.5 61,123.25 62.35,124.6 R21.2 61.75,126.1 61.75,132.75 66.75,137.75 75.25,137.75 76.5,136.5 76.5,135.5 Q8.3 74.45,130.05 R20.1
NetP4_10: P4.10 X2.15 | length 79.5
  Top Layer w1: P4.10 52,114.14 52,91 65.5,77.5 97.46,77.5 X2.15
NetQ3_2: Q3.2 R15.2 U4.10 | length 65.3
  Top Layer w0.6: v1(121,130) 121.25,130 122.75,128.5 U4.10
  Top Layer w1: R15.2 90.125,94.875 v1(92,93) ; R15.2@90.375,96.625 90.8,97.05 Q3.2
  Bottom Layer w0.6: v1(92,93) 92.25,93 99.25,100 106.75,100 120.25,113.5 120.25,114.513 121,115.263 ; 121,115.263 v1(121,130)
NetQ5_2: Q5.2 R18.2 U4.11 | length 47.8
  Top Layer w0.6: U4.11 133.45,129.3 v1(133.5,129.25)
  Top Layer w1: v1(130.75,99.25) 130.75,97.25 132.05,95.95 Q5.2 132.125,95.525 R18.2
  Bottom Layer w0.6: v1(130.75,99.25) 130.75,100.5 133.5,103.25 v1(133.5,129.25)
NetQ7_2: Q7.2 R22.2 U4.31 | length 85.4
  Top Layer w0.6: v1(112.75,127.5) 112.75,128 113.25,128.5 U4.31
  Top Layer w1: v1(64,130.25) 68.25,130.25 69.1,129.4 R22.2 69.1,124.7 Q7.2
  Bottom Layer w0.6: 66,140.25 90.5,140.25 98,132.75 98,125.525 100.7,122.825 106.575,122.825 111.25,127.5 v1(112.75,127.5)
  Bottom Layer w1: v1(64,130.25) 64,138.25 66,140.25
NetQ9_2: Q9.2 R25.2 | length 70.9
  Top Layer w0.4: 108.993,129.25 115.4,129.25
  Top Layer w0.6: R25.2 65.9,159.1 66.55,158.45 Q9.2 66.85,158.45 67.8,157.5 67.8,156.943 70.443,154.3 76.996,154.3 81.522,149.774 81.522,143.021 86.143,138.4 98.6,138.4 101.544,135.456 105.044,135.456 106.025,134.475 106.025,132.218 108.993,129.25
NetQ12_2: Q12.2 R28.2 U4.28 | length 85.5
  Top Layer w0.6: R28.2@72,102.85 Q12.2 ; R28.2 73.4,102.85 74.5,101.75 v1(74.5,95.75) ; U4.28 117.65,130.9 118.5,131.75 v1(118.75,131.75)
  Bottom Layer w0.6: v1(74.5,95.75) 79.5,95.75 86,102.25 105.75,102.25 118.75,115.25 v1(118.75,131.75)
NetQ13_2: Q13.2 R30.2 U4.27 | length 53.5
  Top Layer w0.4: v1(108.85,135.075) 108.85,133.325 110.475,131.7 U4.27
  Top Layer w1: Q13.2 71.2,150.05 72.1,149.15 R30.2 v1(77.1,149.15)
  Bottom Layer w1: v1(77.1,149.15) 83,143.25 93.25,143.25 101.425,135.075 v1(108.85,135.075)
NetQ18_2: Q18.2 R37.2 U4.24 | length 58.4
  Top Layer w0.6: R37.2 84.35,167.95 83.7,167.3 Q18.2 83.7,163.9 82.801,163.001 82.244,163.001 81.9,162.657 81.9,161.243 89.771,153.372 90.835,153.372 94,150.207 94,143.25 95.75,141.5 97.75,141.5 102.25,137 110.5,137 112.65,134.85 U4.24
NetQ31_2: Q31.2 R54.2 U4.26 | length 46.6
  Top Layer w0.4: v1(104.15,124.275) 104.15,123.875 107.425,120.6 107.425,108.225 108.45,107.2 108.45,101.55 Q31.2 ; v1(111.8,133.325) 111.8,133.2 112.5,132.5 U4.26
  Top Layer w1: R54.2 110.125,99.525 Q31.2
  Bottom Layer w0.4: v1(104.15,124.275) 104.15,125.675 v1(111.8,133.325)
NetR2_1: R2.1 U2.8 | length 4.7
  Top Layer w0.6: R2.1 69.6,91.9 71.05,90.45 U2.8
NetR4_2: R4.2 U3.17 | length 11.8
  Top Layer w0.6: U3.17 102.215,131.56 109.025,124.75 R4.2@109.25,124.75
NetR6_1: R6.1 R7.1 USB1.2 | length 49.5
  Top Layer w0.4: 103.8,165.45 USB1.2
  Top Layer w0.6: 103.8,165.45 108,161.25 v1(111.25,161.25) R6.1
  Top Layer w1: R7.1 97.25,149 92,154.25 92,158.25 94,160.25 v1@101.25,160.25
  Bottom Layer w1: v1(101.5,160.25) 102.5,161.25 v1(111.25,161.25)
NetR7_2: R7.2 U6.7 | length 6.4
  Top Layer w0.6: R7.2 99.9,143.15 101.175,144.425 U6.7
NetR8_1: R8.1 USB1.3 | length 12.1
  Top Layer w0.4: 103,164.425 USB1.3 USB1.3@103,168.35
  Top Layer w0.6: 103,164.425 108.25,159.175 108.25,158.85 108,158.6 R8.1@108,158.5
NetR8_2: R8.2 U6.6 | length 22.4
  Top Layer w0.6: U6.6 105.95,145.7 107.75,147.5 107.75,150 103,154.75 103,156.75 103.5,157.25 105.507,157.25 106.857,155.9 R8.2@108,155.9
NetR10_1: R10.1 U5.6 | length 38.6
  Top Layer w0.6: R10.1 122.8,155.8 123.75,156.75 123.75,164.5 125,165.75 130.75,165.75 132,164.5 132,151 129.85,148.85 U5.6
NetR11_1: R11.1 U5.11 | length 10.1
  Top Layer w0.3: U5.11 122.715,146.31 124.025,145 124.025,140.55 125.35,139.225 R11.1
NetU2_1: U2.1 U3.1 | length 63.9
  Top Layer w1: U2.1@65.647,89.103 65.647,89.353 64.5,90.5 64.5,97.25 69,101.75 69,115.75 70,116.75 79,116.75 82.75,120.5 82.75,131 84.58,132.83 U3.1
NetU2_4: U2.4 U3.2 | length 73.9
  Top Layer w1: U2.4@65.45,85 63,85 60.5,87.5 60.5,101.25 63.75,104.5 63.75,116.5 67.25,120 77,120 79.5,122.5 v1(79.5,129.875) ; v1(85.75,129.75) 87.56,131.56 U3.2
  Bottom Layer w1: v1(79.5,129.875) 85.625,129.875 v1(85.75,129.75)
NetU3_7: U3.7 Y1.3 | length 5.3
  Top Layer w1: Y1.3 87.45,124.95 87.71,125.21 U3.7
NetU3_8: U3.8 Y1.1 | length 5.8
  Top Layer w1: Y1.1 87.3,122.55 88.69,123.94 U3.8
NetU4_7: U4.7 Y2.1 | length 5.6
  Top Layer w0.6: Y2.1 120.55,123.05 121.75,124.25 U4.7
NetU4_8: U4.8 Y2.3 | length 5.3
  Top Layer w0.6: U4.8 122.55,124.2 122.95,123.8 Y2.3
NetU6_4: U6.4 Y3.3 | length 15.2
  Top Layer w0.6: Y3.3 98.75,157.75 100.25,156.25 100.25,149 100.975,148.275 U6.4
NetU6_5: U6.5 Y3.1 | length 12.5
  Top Layer w0.6: Y3.1 99,151.75 99,148 100.025,146.975 U6.5
RESET: J1.5 R5.1 SW1.1 U4.29 U5.3 | length 73.9
  Top Layer w0.6: R5.1@107.25,133 R5.1 110.25,130.1 U4.29 118.85,130.1 v1(121.25,132.5) ; J1.5 129.04,169.96 133.25,165.75 133.25,147.8 SW1.1 ; U5.3 130.29,145.04 ; v1(131.25,134.75) 131.25,144.25 130.46,145.04 130.29,145.04 ; 133.05,147.8 130.29,145.04
  Bottom Layer w0.6: v1(121.25,132.5) 122.25,133.5 128.25,133.5 129.5,134.75 v1(131.25,134.75)
RST': R9.2 U5.2 U6.1 U6.16 | length 41.8
  Top Layer w0.6: R9.2 103.1,158.6 101.75,157.25 101.75,153.375 U6.1 103.95,152.05 106,150 v1(106,148.5) ; U6.16 113.25,147 115,145.25 v1@115.25,145.25 ; v1(125.875,143.775) U5.2@127.5,143.775
  Bottom Layer w0.6: v1(106,148.5) 109.5,145 v1(115.25,145) 123.75,145 124.975,143.775 v1(125.875,143.775)
SCK': U5.12 U6.19 | length 13.6
  Top Layer w0.6: U6.19 115.935,150.815 117,149.75 117,147.25 119.21,145.04 U5.12
SCK/D13: J1.3 R11.2 U3.13 U4.17 | length 89.5
  Top Layer w0.3: U4.17 122.65,134.95 R11.2
  Top Layer w0.6: U3.13 101.555,126.48 102.85,127.775 v1(102.85,128.275) ; v1@113.625,136.875 116.725,139.975 121.725,139.975 v1(121.775,140.025) ; v1(117.5,158.6) 117.5,162 123,167.5 J1.3 ; v1@121.875,140.125 v1(121.775,140.025) ; R11.2 121.775,138.875 v1(121.775,140.025)
  Bottom Layer w0.6: v1(102.85,128.275) 104.625,128.275 112.85,136.5 v1(113.25,136.5) ; v1(117.5,158.6) 117.5,161.25 118.75,162.5 120.25,162.5 ; 120.188,162.562 120.25,162.5 ; v1(121.775,140.025) 122.025,140.025 123.3,138.75 126.75,138.75 130.5,142.5 130.5,156 124,162.5 120.25,162.5
T-PWR: R12.2 U5.14 | length 2.7
  Top Layer w0.6: R12.2 121.25,141.75 U5.14
VIN: C2.1 P4.1 U1.1 | length 71.3
  Top Layer w0.6: P4.1 52.5,156.5 61.15,165.15 76.057,165.15 77.1,164.107 77.1,162.762 77.65,162.212 77.65,160.093 81.921,155.821 84.579,155.821 89.1,151.3 C2.1 89.075,150.975 89.075,146.95 U1.1
pads on no net: R6.2 SW1.2 SW1.3 U2.5 U3.3 U3.4 U3.5 U3.6 U3.10 U3.11 U4.1 U4.2 U4.12 U4.14 U4.18 U4.19 U4.22 U4.23 U4.25 U4.30 U6.2 U6.3 U6.9 U6.11 U6.12 U6.13 U6.14 U6.15 USB1.4 X2.4 X2.13 X2.14 X2.30 X2.31
copper on no net:
  other v2: 54.8,80.2 146.8,80.2 54.8,172.2 146.8,172.2

## Polygon pours and split planes (outlines as drawn)
GND on Top Layer "GND" (solid, remove dead copper, pour order 0): 50.8,176.2 150.8,176.2 150.8,76.2 50.8,76.2
GND on Bottom Layer "Bottom Layer-GND" (solid, remove dead copper, pour order 2): 51,175.75 150.5,175.75 150.5,76.5 51,76.5
no net on Bottom Layer "Bottom Layer-No Net" (solid, pour order 4): 52.25,83.25

## Keep-outs
Keep-Out Layer:
  lines w0.254: 50.75,76.2 150.75,76.2 150.75,176.2 50.75,176.2 50.75,76.2

## Silkscreen, mask and mechanical layers (free items; w line width, h text height)
Top Overlay:
  lines w0.254: 60.25,155.5 86.75,155.5 86.75,173.75 60.25,173.75 60.25,155.5 ; 61.25,121 61.25,138 76.937,138 76.937,121 61.25,121 ; 61.25,138.5 61.25,154.75 78.75,154.75 78.75,138.5 61.25,138.5 ; 70.25,98 87.75,98 87.75,113.75 70.25,113.75 70.25,98 ; 88.5,94.475 88.5,118.25 105.5,118.25 105.5,94.475 88.5,94.475 ; 108,94.5 108,118 126,118 126,94.5 108,94.5 ; 129.75,91.5 147.75,91.5 147.75,115.425 129.75,115.425 129.75,91.5
  text "BrkLt" at 61.25,171.5 h1.3
  text "Starter" at 60.5,146.5 h1.3 r90
  text "SDown" at 62.25,136 h1.3
  text "EFAN" at 89.5,116.25 h1.3
  text "BRKSOL" at 108.75,116 h1.3
  text "MSQUIRT" at 130.5,113 h1.3
  text "SUp" at 77.5,111.75 h1.3
Drill Drawing:
  text ".LEGEND" at 155.88,81.28 h1.52
  text "Drill Drawing." at 155.88,78.74 h1.52

## Text inside footprints (layer, text, board x,y; h text height)
J1: Top Overlay "1" at 118.072,170.519 h1.52 r180
U5: Top Overlay "1" at 128.75,141.75 h1.52